# EAGLE board Gibbot v4 (EAGLE 5.12), part 1 of 2
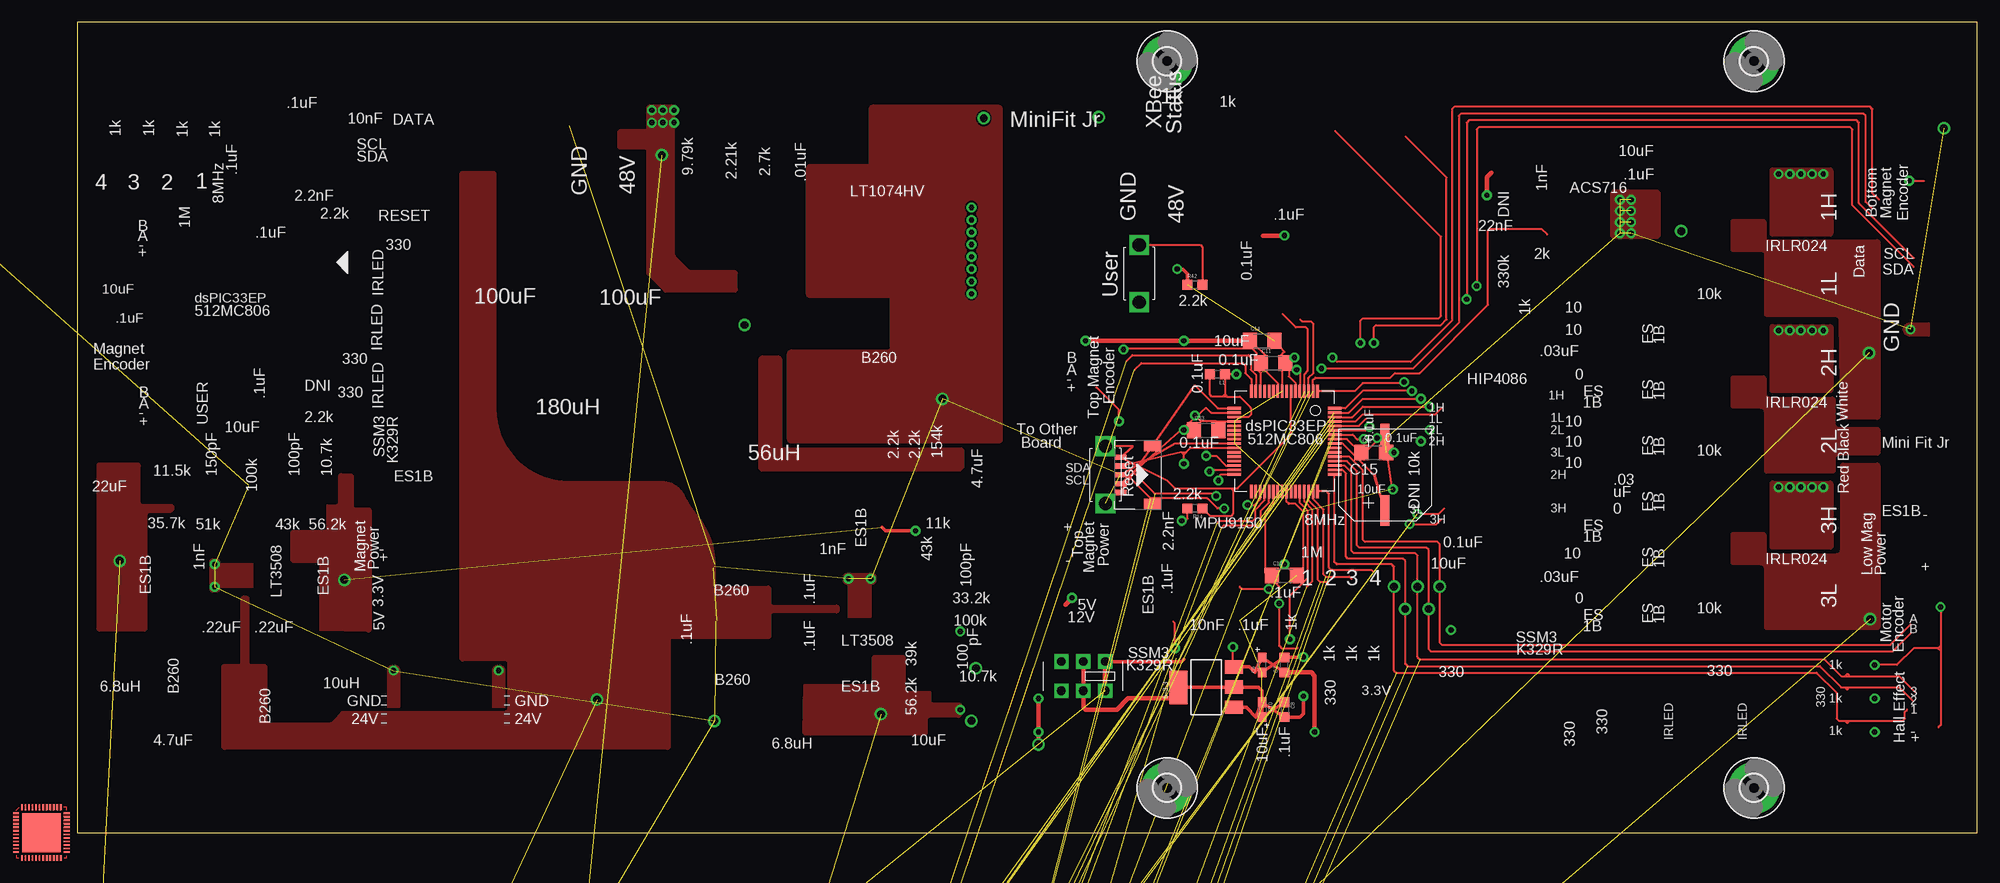
[diagram p0: board, top side]
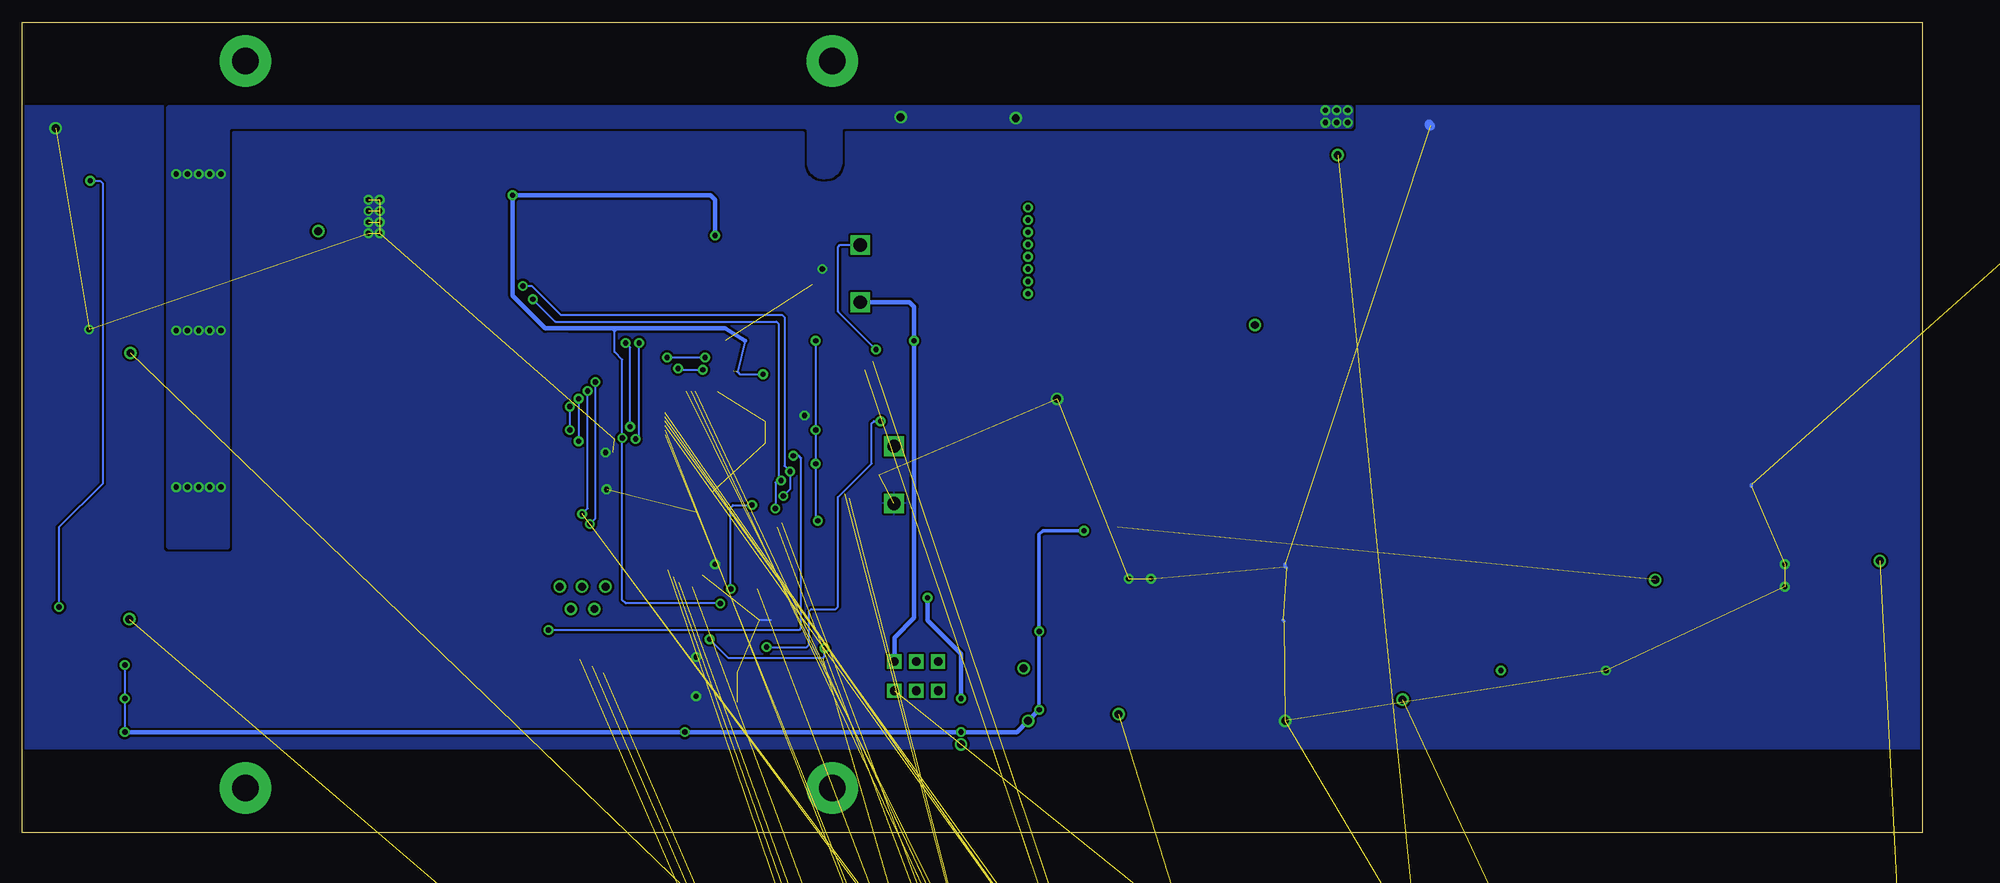
[diagram p1: board, bottom side, seen from below]

Size 215.9 x 92.08 mm. Coordinates in mm from the lower left corner, seen from the top.
Outline: 0,0 215.9,0 215.9,92.08 0,92.08 0,0
Copper layers (1*16): Top 0.035mm / dielectric 1.5mm / Bottom 0.035mm
Design rules "SparkFun *": minimum track width 8mil, minimum drill 20mil, track to track 8mil, track to pad 8mil, pad to pad 0mil, via to via 8mil, smd to smd 0mil, copper to edge 10mil, drill to drill 8mil, minimum pad ring 12mil, minimum via ring 10mil, stop-mask expansion 4mil, vias tented up to drill 25mil, thermal gap 10mil

## Footprints (pad centres in the part's own frame; a part is rotated, then mirrored left to right if it is on the bottom)
SOT223 = smd 1.499 x 2.007: 1 -2.261,-3.15; 2 0.025,-3.15; 3 2.311,-3.15 | smd 3.81 x 2.007: 4 0,3.15
R0603 = smd 1 x 1.1: 1 -0.85,0; 2 0.85,0
1X02_LOCK = drill 1.016 pad 1.88 round: 1 -0.178,0; 2 2.718,0
SOT23F = smd 0.6 x 0.65: D 0,1.125; G -0.95,-1.125; S 0.95,-1.125
0603 = smd 1.1 x 1.1: 1 -0.85,0; 2 0.85,0
0603-POL = smd 1.1 x 1: + 0.85,0; - -0.85,0
1206 = smd 1.6 x 1.8: 1 -1.4,0; 2 1.4,0
EEH-ZA1H101P = smd 1 x 3.5: + 0,-4.05; - 0,4.05
0603-CAP = smd 1.1 x 1: 1 -0.85,0; 2 0.85,0
CAP-PTH-SMALL = drill 0.7 pad 1.651 round: 1 0,0; 2 2.54,0
PCV10 = smd 1.5 x 3.9: + 0,-4.25; - 0,4.25
SMA-DIODE@1 = smd 1.27 x 1.47: A -2.15,0; C 2.15,0
SMB-DIODE = smd 1.75 x 2.3: A -2.54,0; C 2.54,0
POWERDI5 = smd 3.36 x 1.4: A 0,-4.057 | smd 3.36 x 5.01: C 0,0
JST-SH-2 = smd 0.6 x 1.35: 1 0.5,4.675; 2 -0.5,4.675 | smd 1.2 x 2: P$6 -1.8,1; P$7 1.8,1
3,0-PAD = drill 3 pad 5.842 round: B3,0 0,0
JST-SH-5 = smd 0.6 x 1.35: 1 2,4.675; 2 1,4.675; 3 0,4.675; 4 -1,4.675; 5 -2,4.675 | smd 1.2 x 2: P$6 -3.3,1; P$7 3.3,1
JST-SH-4 = smd 0.65 x 1.36: 1 -1.5,4.68; 2 -0.5,4.68; 3 0.5,4.68; 4 1.5,4.68 | smd 1.3 x 2.1: P$5 2.85,1.05; P$6 -2.85,1.05
1X05_LONGPADS = drill 1.118 pad 1.88 long: 1 0,0; 2 2.54,0; 3 5.08,0; 4 7.62,0; 5 10.16,0
1X01 = drill 1.016 pad 1.88 round: 1 0,0
WM8601 = drill 1.854 round: 1 0,1.1; 2 0,6.6 | drill 3.2 round: P$1 0,-6.274
1X01NS = drill 1.016 pad 1.88 round: 1 0,0
SRN6045 = smd 2 x 6: P$1 -2.15,0; P$2 2.15,0
2200LL-820 = drill 1.27 square: 1 0,13.081; 2 0,-13.081
2100LL-181 = drill 1.1 square: 1 0,9.652; 2 0,-9.652
0603-DIODE = smd 1.1 x 1.1: AN -0.85,0; CAT 0.85,0
D2PAK@1 = smd 11.43 x 8.89: D 0,4.445 | smd 2.083 x 3.81: G -2.54,-6.985; S 2.54,-6.985
DPAK = smd 5.791 x 6.274: D 0,1.587 | smd 1.6 x 3: G -2.286,-4.851; S 2.286,-4.851
TACTILE_SWITCH = drill 1.5 square: 1 -3.25,0; 2 3.25,0
39-30-3036 = drill 1.803 round: 1 4.191,0; 2 0,0; 3 -4.191,0 | hole 3: -4.204,-7.29; 4.204,-7.29
D2PAK = smd 11.43 x 9.65: D 0,4.445 | smd 2.083 x 3.81: G -2.54,-6.985; S 2.54,-6.985
1X05 = drill 1.016 pad 1.88 round: 1 0,0; 2 2.54,0; 3 5.08,0; 4 7.62,0; 5 10.16,0
PWR4412-B = drill 1.27 round: P$1 -6.225,0; P$2 6.225,0
TQFP64_10X10 = smd 1.5 x 0.3: 1 -5.7,3.75; 2 -5.7,3.25; 3 -5.7,2.75; 4 -5.7,2.25; 5 -5.7,1.75; 6 -5.7,1.25; 7 -5.7,0.75; 8 -5.7,0.25; 9 -5.7,-0.25; 10 -5.7,-0.75; 11 -5.7,-1.25; 12 -5.7,-1.75; 13 -5.7,-2.25; 14 -5.7,-2.75; 15 -5.7,-3.25; 16 -5.7,-3.75; 33 5.7,-3.75; 34 5.7,-3.25; 35 5.7,-2.75; 36 5.7,-2.25; 37 5.7,-1.75; 38 5.7,-1.25; 39 5.7,-0.75; 40 5.7,-0.25; 41 5.7,0.25; 42 5.7,0.75; 43 5.7,1.25; 44 5.7,1.75; 45 5.7,2.25; 46 5.7,2.75; 47 5.7,3.25; 48 5.7,3.75 | smd 0.3 x 1.5: 17 -3.75,-5.7; 18 -3.25,-5.7; 19 -2.75,-5.7; 20 -2.25,-5.7; 21 -1.75,-5.7; 22 -1.25,-5.7; 23 -0.75,-5.7; 24 -0.25,-5.7; 25 0.25,-5.7; 26 0.75,-5.7; 27 1.25,-5.7; 28 1.75,-5.7; 29 2.25,-5.7; 30 2.75,-5.7; 31 3.25,-5.7; 32 3.75,-5.7; 49 3.75,5.7; 50 3.25,5.7; 51 2.75,5.7; 52 2.25,5.7; 53 1.75,5.7; 54 1.25,5.7; 55 0.75,5.7; 56 0.25,5.7; 57 -0.25,5.7; 58 -0.75,5.7; 59 -1.25,5.7; 60 -1.75,5.7; 61 -2.25,5.7; 62 -2.75,5.7; 63 -3.25,5.7; 64 -3.75,5.7
TQFPNL-48 = smd 0.65 x 0.2: 1 -2.875,2.2; 2 -2.875,1.8; 3 -2.875,1.4; 4 -2.875,1; 5 -2.875,0.6; 6 -2.875,0.2; 7 -2.875,-0.2; 8 -2.875,-0.6; 9 -2.875,-1; 10 -2.875,-1.4; 11 -2.875,-1.8; 12 -2.875,-2.2; 25 2.875,-2.2; 26 2.875,-1.8; 27 2.875,-1.4; 28 2.875,-1; 29 2.875,-0.6; 30 2.875,-0.2; 31 2.875,0.2; 32 2.875,0.6; 33 2.875,1; 34 2.875,1.4; 35 2.875,1.8; 36 2.875,2.2 | smd 0.2 x 0.65: 13 -2.2,-2.875; 14 -1.8,-2.875; 15 -1.4,-2.875; 16 -1,-2.875; 17 -0.6,-2.875; 18 -0.2,-2.875; 19 0.2,-2.875; 20 0.6,-2.875; 21 1,-2.875; 22 1.4,-2.875; 23 1.8,-2.875; 24 2.2,-2.875; 37 2.2,2.875; 38 1.8,2.875; 39 1.4,2.875; 40 1,2.875; 41 0.6,2.875; 42 0.2,2.875; 43 -0.2,2.875; 44 -0.6,2.875; 45 -1,2.875; 46 -1.4,2.875; 47 -1.8,2.875; 48 -2.2,2.875 | smd 4.4 x 4.4: PAD 0,0
SSOP28-NARROW = smd 0.432 x 1.27: P$1 -4.128,-2.54; P$2 -3.493,-2.54; P$3 -2.857,-2.54; P$4 -2.223,-2.54; P$5 -1.587,-2.54; P$6 -0.953,-2.54; P$7 -0.318,-2.54; P$8 0.318,-2.54; P$9 0.953,-2.54; P$10 1.587,-2.54; P$11 2.223,-2.54; P$12 2.857,-2.54; P$13 3.493,-2.54; P$14 4.128,-2.54; P$15 4.128,2.54; P$16 3.493,2.54; P$17 2.857,2.54; P$18 2.223,2.54; P$19 1.587,2.54; P$20 0.953,2.54; P$21 0.318,2.54; P$22 -0.318,2.54; P$23 -0.953,2.54; P$24 -1.587,2.54; P$25 -2.223,2.54; P$26 -2.857,2.54; P$27 -3.493,2.54; P$28 -4.128,2.54
DIODE-ZENER = drill 0.9 round: P$1 -3.556,0; P$2 3.556,0
TO220-5 = drill 1.1 square: 1 3.81,-3.404; 2 0,-1.702; 3 3.81,0; 4 0,1.702; 5 3.81,3.404 | smd 12.7 x 10.541: PAD -16.434,0 | drill 3.937 round: PAD2 -18.72,0
XBEE-SILK = drill 0.8 pad 1.524 round: 1 -11,20; 2 -11,18; 3 -11,16; 4 -11,14; 5 -11,12; 6 -11,10; 7 -11,8; 8 -11,6; 9 -11,4; 10 -11,2; 11 11,2; 12 11,4; 13 11,6; 14 11,8; 15 11,10; 16 11,12; 17 11,14; 18 11,16; 19 11,18; 20 11,20
LGA24_4X4 = smd 0.8 x 0.35: 1 -2,1.25; 2 -2,0.75; 3 -2,0.25; 4 -2,-0.25; 5 -2,-0.75; 6 -2,-1.25; 13 2,-1.25; 14 2,-0.75; 15 2,-0.25; 16 2,0.25; 17 2,0.75; 18 2,1.25 | smd 0.35 x 0.85: 7 -1.25,-1.975; 8 -0.75,-1.975; 9 -0.25,-1.975; 10 0.25,-1.975; 11 0.75,-1.975; 12 1.25,-1.975; 19 1.25,1.975; 20 0.75,1.975; 21 0.25,1.975; 22 -0.25,1.975; 23 -0.75,1.975; 24 -1.25,1.975
TSSOP16 = smd 0.45 x 1.05: 1 -2.275,-2.775; 2 -1.625,-2.775; 3 -0.975,-2.775; 4 -0.325,-2.775; 5 0.325,-2.775; 6 0.975,-2.775; 7 1.625,-2.775; 8 2.275,-2.775; 9 2.275,2.775; 10 1.625,2.775; 11 0.975,2.775; 12 0.325,2.775; 13 -0.325,2.775; 14 -0.975,2.775; 15 -1.625,2.775; 16 -2.275,2.775 | smd 2.8 x 2.8: 17 0,0
SOIC24-W = smd 0.533 x 1.981: 1 -6.985,-4.686; 2 -5.715,-4.686; 3 -4.445,-4.686; 4 -3.175,-4.686; 5 -1.905,-4.686; 6 -0.635,-4.686; 7 0.635,-4.686; 8 1.905,-4.686; 9 3.175,-4.686; 10 4.445,-4.686; 11 5.715,-4.686; 12 6.985,-4.686; 13 6.985,4.686; 14 5.715,4.686; 15 4.445,4.686; 16 3.175,4.686; 17 1.905,4.686; 18 0.635,4.686; 19 -0.635,4.686; 20 -1.905,4.686; 21 -3.175,4.686; 22 -4.445,4.686; 23 -5.715,4.686; 24 -6.985,4.686
SOIC16-W = smd 0.65 x 2.25: 1 -4.445,-4.75; 2 -3.175,-4.75; 3 -1.905,-4.75; 4 -0.635,-4.75; 5 0.635,-4.75; 6 1.905,-4.75; 7 3.175,-4.75; 8 4.445,-4.75; 9 4.445,4.75; 10 3.175,4.75; 11 1.905,4.75; 12 0.635,4.75; 13 -0.635,4.75; 14 -1.905,4.75; 15 -3.175,4.75; 16 -4.445,4.75
SLIDE_SWITCH = drill 1 square: 1 -2.489,1.651; 2 0,1.651; 3 2.489,1.651; 4 2.489,-1.651; 5 0,-1.651; 6 -2.489,-1.651

## Placement (x,y rotation side)
5-3.3  REG1117  [SOT223]  128.27,16.51 90 top
21.5K1  21.5k  [R0603]  10.16,-120.65 0 top  (outside the outline)
BAT  [1X02_LOCK]  -40.64,184.15 0 top  (outside the outline)
BMAGMOS_2  N-MOSSOT23F  [SOT23F]  39.37,-349.25 0 top  (outside the outline)
C1  .1uF  [0603]  33.02,-224.79 0 top  (outside the outline)
C2  1nF  [0603]  36.83,-224.79 0 top  (outside the outline)
C3  DNI  [0603]  1.27,-231.14 0 top  (outside the outline)
C4  22nF  [0603]  5.08,-231.14 0 top  (outside the outline)
C5  10uF  [0603]  26.67,-224.79 0 top  (outside the outline)
C6  .1uF  [0603]  43.18,-295.91 0 top  (outside the outline)
C7  0.1uF  [0603]  137.16,19.05 90 top
C8  0.1uF  [0603]  137.16,13.97 270 top
C9  10uF  [0603-POL]  134.62,19.05 90 top
C10  10uF  [0603-POL]  134.62,13.97 270 top
C11  .1uF  [1206]  135.89,53.34 0 top
C12  .1uF  [1206]  147.32,43.18 0 top
C13  .1uF  [1206]  137.16,29.21 0 top
C14  10uF  [1206]  134.62,55.88 0 top
C15  10uF  [EEH-ZA1H101P]  148.59,40.64 0 top
C16  DNI  [0603]  7.62,-177.8 0 top  (outside the outline)
C17  .03uF  [0603]  11.43,-177.8 0 top  (outside the outline)
C18  .03uF  [0603]  15.24,-177.8 0 top  (outside the outline)
C19  .03uF  [0603]  19.05,-177.8 0 top  (outside the outline)
C20  10nF  [0603]  46.99,-295.91 0 top  (outside the outline)
C21  .1uF  [0603]  1.27,-302.26 0 top  (outside the outline)
C22  .1uF  [0603]  5.08,-302.26 0 top  (outside the outline)
C23  2.2nF  [0603]  8.89,-302.26 0 top  (outside the outline)
C24  10nF  [0603]  35.56,-341.63 0 top  (outside the outline)
C25  .1uF  [0603]  39.37,-341.63 0 top  (outside the outline)
C26  .1uF  [0603]  1.27,-349.25 0 top  (outside the outline)
C27  2.2nF  [0603]  5.08,-349.25 0 top  (outside the outline)
C28  1nF  [0603]  8.89,-349.25 0 top  (outside the outline)
C29  .1uF  [0603]  22.86,-177.8 0 top  (outside the outline)
C30  10uF  [0603]  25.4,-161.29 0 top  (outside the outline)
C31  150pF  [0603]  12.7,-349.25 0 top  (outside the outline)
C32  22uF  [0603]  16.51,-349.25 0 top  (outside the outline)
C33  .1uF  [1206]  128.27,45.72 0 top
C34  100pf  [0603]  20.32,-349.25 0 top  (outside the outline)
C35  10uF  [0603]  24.13,-349.25 0 top  (outside the outline)
C36  0.22uF  [0603]  27.94,-349.25 0 top  (outside the outline)
C37  0.22uF  [0603]  31.75,-349.25 0 top  (outside the outline)
C38  4.7uF  [0603-CAP]  35.56,-349.25 0 top  (outside the outline)
C39  [0603]  -6.35,-375.92 0 top  (outside the outline)
C40  100uF  [EEH-ZA1H101P]  -20.32,-375.92 0 top  (outside the outline)
C41  100uF  [EEH-ZA1H101P]  -31.75,-375.92 0 top  (outside the outline)
C42  [0603]  -35.56,-384.81 0 top  (outside the outline)
C43  220n  [0603]  -39.37,-400.05 0 top  (outside the outline)
C44  [0603]  -38.1,-421.64 0 top  (outside the outline)
C45  [0603]  -74.93,-445.77 0 top  (outside the outline)
C46  [0603-CAP]  -74.93,-453.39 0 top  (outside the outline)
C47  [0603]  -62.23,107.95 0 top  (outside the outline)
C48  [0603]  -58.42,107.95 0 top  (outside the outline)
C49  [0603]  -81.28,-464.82 0 top  (outside the outline)
C50  [0603]  -81.28,-480.06 0 top  (outside the outline)
C51  [0603]  -81.28,-487.68 0 top  (outside the outline)
C52  [0603]  -81.28,-491.49 0 top  (outside the outline)
C53  [0603]  -81.28,-502.92 0 top  (outside the outline)
C55  .1uF  [0603]  22.86,-58.42 0 top  (outside the outline)
C56  .1uF  [0603]  26.67,-58.42 0 top  (outside the outline)
C57  .1uF  [0603]  30.48,-58.42 0 top  (outside the outline)
C58  10uF  [0603]  2.54,-39.37 0 top  (outside the outline)
C63  10uF  [0603-POL]  16.51,-53.34 0 top  (outside the outline)
C72  1nF  [0603]  53.34,-128.27 0 top  (outside the outline)
C73  100pF  [0603]  57.15,-128.27 0 top  (outside the outline)
C74  4.7uF  [0603]  1.27,-134.62 0 top  (outside the outline)
C75  100pf  [0603]  5.08,-134.62 0 top  (outside the outline)
C76  10uF  [0603]  8.89,-134.62 0 top  (outside the outline)
C77  0.1uF  [0603]  12.7,-134.62 0 top  (outside the outline)
C78  0.1uF  [0603]  16.51,-134.62 0 top  (outside the outline)
C79  0.1uF  [0603-CAP]  20.32,-134.62 0 top  (outside the outline)
CBIAS  1uF  [CAP-PTH-SMALL]  -50.8,196.85 0 top  (outside the outline)
CI1  100uF  [PCV10]  -39.37,153.67 0 top  (outside the outline)
CI2  100uF  [PCV10]  -26.67,153.67 0 top  (outside the outline)
CIBMON  10nF  [CAP-PTH-SMALL]  -44.45,196.85 0 top  (outside the outline)
CIIMON  10nF  [CAP-PTH-SMALL]  -38.1,196.85 0 top  (outside the outline)
CO1  100uF  [PCV10]  -76.2,175.26 0 top  (outside the outline)
CO2  100uF  [PCV10]  -63.5,175.26 0 top  (outside the outline)
CTMR  0  [CAP-PTH-SMALL]  -31.75,196.85 0 top  (outside the outline)
CVIN  1uF  [CAP-PTH-SMALL]  -25.4,196.85 0 top  (outside the outline)
CVIN1  1uF  [CAP-PTH-SMALL]  -81.28,201.93 0 top  (outside the outline)
D1  ES1B  [SMA-DIODE@1]  2.54,-168.91 0 top  (outside the outline)
D2  ES1B  [SMA-DIODE@1]  10.16,-168.91 0 top  (outside the outline)
D3  ES1B  [SMA-DIODE@1]  17.78,-168.91 0 top  (outside the outline)
D4  ES1B  [SMA-DIODE@1]  25.4,-168.91 0 top  (outside the outline)
D5  ES1B  [SMA-DIODE@1]  2.54,-173.99 0 top  (outside the outline)
D6  ES1B  [SMA-DIODE@1]  38.1,-297.18 0 top  (outside the outline)
D7  ES1B  [SMA-DIODE@1]  15.24,-342.9 0 top  (outside the outline)
D8  B260  [SMB-DIODE]  3.81,-328.93 0 top  (outside the outline)
D9  ES1B  [SMA-DIODE@1]  10.16,-173.99 0 top  (outside the outline)
D10  ES1B  [SMA-DIODE@1]  17.78,-173.99 0 top  (outside the outline)
D11  ES1B  [SMA-DIODE@1]  22.86,-342.9 0 top  (outside the outline)
D12  B260  [SMB-DIODE]  12.7,-328.93 0 top  (outside the outline)
D13  ES1B  [SMA-DIODE@1]  30.48,-342.9 0 top  (outside the outline)
D14  PDS760  [POWERDI5]  -29.21,173.99 0 top  (outside the outline)
D19  ES1B  [SMA-DIODE@1]  25.4,-173.99 0 top  (outside the outline)
D20  ES1B  [SMA-DIODE@1]  2.54,-179.07 0 top  (outside the outline)
D26  B260  [SMB-DIODE]  41.91,-111.76 0 top  (outside the outline)
D27  ES1B  [SMA-DIODE@1]  40.64,-129.54 0 top  (outside the outline)
D28  B260  [SMB-DIODE]  50.8,-111.76 0 top  (outside the outline)
D29  ES1B  [SMA-DIODE@1]  48.26,-129.54 0 top  (outside the outline)
D30  B260  [SMB-DIODE]  3.81,-121.92 0 top  (outside the outline)
DATA1_1  [JST-SH-2]  2.54,-359.41 0 top  (outside the outline)
DATA3  [JST-SH-2]  35.56,-271.78 0 top  (outside the outline)
DATA4  [JST-SH-2]  43.18,-271.78 0 top  (outside the outline)
GND59  [JST-SH-2]  2.54,-281.94 0 top  (outside the outline)
H1  MOUNT-PAD-ROUND3.0  [3,0-PAD]  123.83,5.08 0 top
H2  MOUNT-PAD-ROUND3.0  [3,0-PAD]  190.5,5.08 0 top
H3  MOUNT-PAD-ROUND3.0  [3,0-PAD]  190.5,87.63 0 top
H4  MOUNT-PAD-ROUND3.0  [3,0-PAD]  123.83,87.63 0 top
H5  MOUNT-PAD-ROUND3.0  [3,0-PAD]  13.97,-308.61 0 top  (outside the outline)
H6  MOUNT-PAD-ROUND3.0  [3,0-PAD]  22.86,-308.61 0 top  (outside the outline)
H11  MOUNT-PAD-ROUND3.0  [3,0-PAD]  3.81,-111.76 0 top  (outside the outline)
H12  MOUNT-PAD-ROUND3.0  [3,0-PAD]  12.7,-111.76 0 top  (outside the outline)
HALL1  [JST-SH-5]  39.37,-241.3 0 top  (outside the outline)
IRLED7  [JST-SH-2]  10.16,-281.94 0 top  (outside the outline)
IRLED8  [JST-SH-2]  17.78,-281.94 0 top  (outside the outline)
IRLED9  [JST-SH-2]  25.4,-281.94 0 top  (outside the outline)
IRLED10  [JST-SH-2]  36.83,-25.4 0 top  (outside the outline)
IRLED11  [JST-SH-2]  44.45,-25.4 0 top  (outside the outline)
IRLED12  [JST-SH-2]  52.07,-25.4 0 top  (outside the outline)
JP1  [JST-SH-4]  31.75,-312.42 0 top  (outside the outline)
JP2  [1X05_LONGPADS]  -5.08,-372.11 0 top  (outside the outline)
JP3  M01PTH  [1X01]  -39.37,172.72 0 top  (outside the outline)
JP4  [JST-SH-4]  3.81,-322.58 0 top  (outside the outline)
JP5  [WM8601]  -78.74,160.02 0 top  (outside the outline)
JP14  M01SMDNS  [1X01NS]  -49.53,201.93 0 top  (outside the outline)
L1  DNI  [0603]  129.54,52.07 180 top
L2  6.8uH  [SRN6045]  27.94,-327.66 0 top  (outside the outline)
L3  10uH  [SRN6045]  35.56,-327.66 0 top  (outside the outline)
L4  82uH  [2200LL-820]  -67.31,132.08 0 top  (outside the outline)
L8  DNI  [0603]  24.13,-63.5 0 top  (outside the outline)
L11  6.8uH  [SRN6045]  20.32,-120.65 0 top  (outside the outline)
L12  56uH  [2100LL-181]  11.43,-77.47 0 top  (outside the outline)
L13  15uH  [2100LL-181]  35.56,-77.47 0 top  (outside the outline)
LED1  [0603-DIODE]  -45.72,201.93 0 top  (outside the outline)
LED2  [0603-DIODE]  -41.91,201.93 0 top  (outside the outline)
LED6  [0603-DIODE]  12.7,-302.26 0 top  (outside the outline)
LED7  [0603-DIODE]  16.51,-302.26 0 top  (outside the outline)
LED8  [0603-DIODE]  20.32,-302.26 0 top  (outside the outline)
LED9  [0603-DIODE]  24.13,-302.26 0 top  (outside the outline)
LED10  [0603-DIODE]  31.75,-63.5 0 top  (outside the outline)
LED11  [0603-DIODE]  35.56,-63.5 0 top  (outside the outline)
LED12  [0603-DIODE]  39.37,-63.5 0 top  (outside the outline)
LED13  [0603-DIODE]  43.18,-63.5 0 top  (outside the outline)
LED14  [0603-DIODE]  27.94,-302.26 0 top  (outside the outline)
LOWMAG1  [JST-SH-2]  11.43,-322.58 0 top  (outside the outline)
M1  [SOT23F]  -43.18,-407.67 0 top  (outside the outline)
M2  [SOT23F]  -34.29,-421.64 0 top  (outside the outline)
M3  IRF1404  [D2PAK@1]  -49.53,-420.37 0 top  (outside the outline)
M4  FDD8451  [DPAK]  -58.42,-427.99 0 top  (outside the outline)
M5  [D2PAK@1]  -69.85,-426.72 0 top  (outside the outline)
M6  [SOT23F]  -74.93,115.57 0 top  (outside the outline)
M7  [SOT23F]  -71.12,115.57 0 top  (outside the outline)
MAINRESET  TACTILE_SWITCH  [TACTILE_SWITCH]  116.84,40.64 270 top
MAINUSER  TACTILE_SWITCH  [TACTILE_SWITCH]  120.65,63.5 90 top
MOT1  [39-30-3036]  7.62,-182.88 0 top  (outside the outline)
P1  P-MOS  [D2PAK]  -45.72,128.27 0 top  (outside the outline)
P2  P-MOS  [D2PAK]  -31.75,128.27 0 top  (outside the outline)
POWER1  [JST-SH-4]  21.59,-114.3 0 top  (outside the outline)
POWER1_2  [JST-SH-4]  3.81,-312.42 0 top  (outside the outline)
POWER2_2  [JST-SH-2]  20.32,-322.58 0 top  (outside the outline)
POWER3  [JST-SH-2]  20.32,-271.78 0 top  (outside the outline)
POWER5  [JST-SH-2]  52.07,-76.2 0 top  (outside the outline)
PROG  [JST-SH-5]  123.19,40.64 90 top
PROG_1  [1X05]  2.54,-54.61 0 top  (outside the outline)
R1  2k  [0603]  16.51,-226.06 0 top  (outside the outline)
R2  1k  [0603]  21.59,-226.06 0 top  (outside the outline)
R3  330k  [0603]  33.02,-213.36 0 top  (outside the outline)
R4  20k  [0603]  1.27,-226.06 0 top  (outside the outline)
R5  20k  [0603]  6.35,-226.06 0 top  (outside the outline)
R6  20k  [0603]  11.43,-226.06 0 top  (outside the outline)
R7  1k  [0603]  21.59,-297.18 0 top  (outside the outline)
R8  1k  [0603]  26.67,-297.18 0 top  (outside the outline)
R9  1k  [0603]  31.75,-297.18 0 top  (outside the outline)
R10  1k  [0603]  15.24,-287.02 0 top  (outside the outline)
R11  52.3k  [0603]  2.54,-336.55 0 top  (outside the outline)
R12  51k  [0603]  2.54,-344.17 0 top  (outside the outline)
R13  11.5k  [0603]  8.89,-336.55 0 top  (outside the outline)
R14  2.2k  [0603]  127,36.83 180 top
R15  35.7k  [0603]  15.24,-336.55 0 top  (outside the outline)
R16  10k  [0603]  20.32,-162.56 0 top  (outside the outline)
R17  1k  [0603]  20.32,-287.02 0 top  (outside the outline)
R18  1k  [0603]  25.4,-287.02 0 top  (outside the outline)
R19  1k  [0603]  30.48,-287.02 0 top  (outside the outline)
R20  56.2k  [0603]  21.59,-336.55 0 top  (outside the outline)
R21  10.7k  [0603]  27.94,-336.55 0 top  (outside the outline)
R22  43k  [0603]  7.62,-344.17 0 top  (outside the outline)
R23  100k  [0603]  34.29,-336.55 0 top  (outside the outline)
R24  1k  [R0603]  -12.7,-374.65 0 top  (outside the outline)
R25  10k  [R0603]  -12.7,-381 0 top  (outside the outline)
R26  [0603]  -43.18,-411.48 0 top  (outside the outline)
R27  30k  [0603]  -39.37,-403.86 0 top  (outside the outline)
R28  330k  [0603]  -39.37,-407.67 0 top  (outside the outline)
R29  1k  [R0603]  -41.91,-416.56 0 top  (outside the outline)
R30  10k  [R0603]  -36.83,-416.56 0 top  (outside the outline)
R31  1k  [0603]  35.56,-287.02 0 top  (outside the outline)
R32  330  [0603]  40.64,-287.02 0 top  (outside the outline)
R33  330  [0603]  45.72,-287.02 0 top  (outside the outline)
R34  10ohm  [0603]  17.78,-140.97 0 top  (outside the outline)
R35  10ohm  [0603]  25.4,-140.97 0 top  (outside the outline)
R36  10ohm  [0603]  1.27,-154.94 0 top  (outside the outline)
R37  10ohm  [0603]  8.89,-154.94 0 top  (outside the outline)
R38  10ohm  [0603]  16.51,-154.94 0 top  (outside the outline)
R39  10ohm  [0603]  24.13,-154.94 0 top  (outside the outline)
R40  0ohm  [0603]  1.27,-162.56 0 top  (outside the outline)
R41  0ohm  [0603]  7.62,-162.56 0 top  (outside the outline)
R42  2.2k  [0603]  127,62.23 0 top
R43  0ohm  [0603]  13.97,-162.56 0 top  (outside the outline)
R44  330  [0603]  1.27,-297.18 0 top  (outside the outline)
R45  330k  [0603]  -41.91,-421.64 0 top  (outside the outline)
R46  [0603]  -41.91,-426.72 0 top  (outside the outline)
R47  [0603]  -52.07,-430.53 0 top  (outside the outline)
R48  [0603]  -52.07,-434.34 0 top  (outside the outline)
R49  [0603]  -74.93,-438.15 0 top  (outside the outline)
R50  [0603]  -74.93,-441.96 0 top  (outside the outline)
R51  [0603]  -74.93,-449.58 0 top  (outside the outline)
R52  1k  [R0603]  -74.93,102.87 0 top  (outside the outline)
R53  10k  [R0603]  -69.85,102.87 0 top  (outside the outline)
R54  [0603]  -74.93,-457.2 0 top  (outside the outline)
R55  [0603]  -67.31,115.57 0 top  (outside the outline)
R56  1k  [R0603]  -64.77,102.87 0 top  (outside the outline)
R57  10k  [R0603]  -74.93,110.49 0 top  (outside the outline)
R58  [0603]  -81.28,-483.87 0 top  (outside the outline)
R59  330k  [0603]  -74.93,-461.01 0 top  (outside the outline)
R60  10k  [R0603]  -81.28,-459.74 0 top  (outside the outline)
R61  2.2k  [0603]  46.99,-39.37 0 top  (outside the outline)
R62  [0603]  -81.28,-468.63 0 top  (outside the outline)
R63  [0603]  -81.28,-476.25 0 top  (outside the outline)
R64  [0603]  -81.28,-495.3 0 top  (outside the outline)
R65  [0603]  -81.28,-499.11 0 top  (outside the outline)
R66  1k  [0603]  1.27,-46.99 0 top  (outside the outline)
R67  1k  [0603]  6.35,-46.99 0 top  (outside the outline)
R68  1k  [0603]  11.43,-46.99 0 top  (outside the outline)
R69  1k  [0603]  16.51,-46.99 0 top  (outside the outline)
R70  330  [0603]  21.59,-46.99 0 top  (outside the outline)
R71  330  [0603]  26.67,-46.99 0 top  (outside the outline)
R72  330  [0603]  31.75,-46.99 0 top  (outside the outline)
R73  2.2k  [0603]  36.83,-46.99 0 top  (outside the outline)
R74  1k  [0603]  -57.15,201.93 0 top  (outside the outline)
R75  1k  [0603]  -53.34,201.93 0 top  (outside the outline)
R76  21.6k  [1206]  -33.02,185.42 0 top  (outside the outline)
R77  [0603]  -81.28,-506.73 0 top  (outside the outline)
R78  [0603]  -81.28,-510.54 0 top  (outside the outline)
R82  33.2k  [0603]  25.4,-120.65 0 top  (outside the outline)
R83  43k  [0603]  7.62,-129.54 0 top  (outside the outline)
R84  11k  [0603]  12.7,-129.54 0 top  (outside the outline)
R85  154k  [0603]  31.75,-120.65 0 top  (outside the outline)
R86  56.2k  [0603]  38.1,-120.65 0 top  (outside the outline)
R87  10.7k  [0603]  44.45,-120.65 0 top  (outside the outline)
R88  39k  [0603]  17.78,-129.54 0 top  (outside the outline)
R89  2.2k  [0603]  22.86,-129.54 0 top  (outside the outline)
R90  2.2k  [0603]  27.94,-129.54 0 top  (outside the outline)
R91  100k  [0603]  50.8,-120.65 0 top  (outside the outline)
R92  2.21k  [0603]  1.27,-129.54 0 top  (outside the outline)
R93  2.7k  [0603]  33.02,-129.54 0 top  (outside the outline)
RBFB1  BFB1  [1206]  -25.4,185.42 0 top  (outside the outline)
RBFB2  133k  [1206]  -78.74,191.77 0 top  (outside the outline)
RCL  8k  [1206]  -71.12,191.77 0 top  (outside the outline)
RCS  5mOhm  [PWR4412-B]  -74.93,185.42 0 top  (outside the outline)
RCX  4k  [1206]  -63.5,191.77 0 top  (outside the outline)
RD  9.91k  [1206]  -55.88,191.77 0 top  (outside the outline)
RFB1  FB1  [1206]  -48.26,191.77 0 top  (outside the outline)
RFB2  2.21k  [1206]  -40.64,191.77 0 top  (outside the outline)
RFDBK  10k  [1206]  -33.02,191.77 0 top  (outside the outline)
RIL  10k  [1206]  -25.4,191.77 0 top  (outside the outline)
RIS  5mOhm  [PWR4412-B]  -59.69,185.42 0 top  (outside the outline)
RMV1  VM1  [1206]  -78.74,196.85 0 top  (outside the outline)
RNTC1  NTC  [CAP-PTH-SMALL]  -74.93,201.93 0 top  (outside the outline)
ROFB1  OFB1  [1206]  -71.12,196.85 0 top  (outside the outline)
ROFB2  127k  [1206]  -63.5,196.85 0 top  (outside the outline)
RVM2  100k  [1206]  -55.88,196.85 0 top  (outside the outline)
SECRESET1  TACTILE_SWITCH  [TACTILE_SWITCH]  26.67,-53.34 0 top  (outside the outline)
SECUSER1  TACTILE_SWITCH  [TACTILE_SWITCH]  36.83,-53.34 0 top  (outside the outline)
TMAG1  [JST-SH-4]  12.7,-271.78 0 top  (outside the outline)
TMAGMOS1  N-MOSSOT23F  [SOT23F]  31.75,-302.26 0 top  (outside the outline)
TO_PIC  [1X02_LOCK]  -49.53,184.15 0 top  (outside the outline)
TOPMAG1  [JST-SH-2]  27.94,-271.78 0 top  (outside the outline)
U$1  DSPIC33EP512MC806  [TQFP64_10X10]  137.16,44.45 270 top
U$2  IRLR024  [DPAK]  5.08,-201.93 0 top  (outside the outline)
U$3  ISL94203  [TQFPNL-48]  -4.07,0 0 top
U$4  DSPIC33EP512MC806  [TQFP64_10X10]  2.54,-24.13 0 top  (outside the outline)
U$5  [TQFPNL-48]  -3.81,-364.49 0 top  (outside the outline)
U$6  LTC4000  [SSOP28-NARROW]  -49.53,172.72 0 top  (outside the outline)
U$7  DIODE-ZENERPTH  [DIODE-ZENER]  -64.77,201.93 0 top  (outside the outline)
U$8  LT1074HV  [TO220-5]  -50.8,154.94 0 top  (outside the outline)
U$13  XBEE-1B2  [XBEE-SILK]  12.7,-261.62 0 top  (outside the outline)
U$16  MPU-9150  [LGA24_4X4]  20.32,-328.93 0 top  (outside the outline)
U$17  MPU-9150  [LGA24_4X4]  10.16,-288.29 0 top  (outside the outline)
U$21  LT3508  [TSSOP16]  30.48,-318.77 0 top  (outside the outline)
U$22  HIP4086  [SOIC24-W]  7.62,-144.78 0 top  (outside the outline)
U$26  LT3508  [TSSOP16]  31.75,-111.76 0 top  (outside the outline)
U$29  LT1074HV  [TO220-5]  22.86,-99.06 0 top  (outside the outline)
U$31  IRLR024  [DPAK]  15.24,-201.93 0 top  (outside the outline)
U$32  IRLR024  [DPAK]  25.4,-201.93 0 top  (outside the outline)
U$33  IRLR024  [DPAK]  5.08,-214.63 0 top  (outside the outline)
U$35  IRLR024  [DPAK]  15.24,-214.63 0 top  (outside the outline)
U$36  IRLR024  [DPAK]  25.4,-214.63 0 top  (outside the outline)
U$37  ACS716  [SOIC16-W]  24.13,-187.96 0 top  (outside the outline)
U$38  SLIDE_SWTHROUGHHOLE  [SLIDE_SWITCH]  114.3,17.78 180 top

## Library data of the parts
5-3.3 BAT BMAGMOS_2 C1-C37 C39-C45 C47-C53 C55-C58 C63 C72-C78 CBIAS CI1 CI2 CIBMON CIIMON CO1 CO2 CTMR CVIN CVIN1 D1-D14 D19 D20 D26-D30 DATA1_1 DATA3 DATA4 GND59 H1-H6 H11 H12 HALL1 IRLED7-IRLED12 JP1 JP3-JP5 JP14 L1-L4 L8 L11 L12 LED1 LED2 LED6-LED14 LOWMAG1 M1-M7 MAINRESET MAINUSER MOT1 P1 P2 POWER1 POWER1_2 POWER2_2 POWER3 POWER5 PROG PROG_1 R1-R23 R26-R28 R31-R51 R54 R55 R58 R59 R61-R78 R82-R93 RBFB1 RBFB2 RCL RCS RCX RD RFB1 RFB2 RFDBK RIL RIS RMV1 RNTC1 ROFB1 ROFB2 RVM2 SECRESET1 SECUSER1 TMAG1 TMAGMOS1 TO_PIC TOPMAG1 U$1 U$2 U$4-U$8 U$13 U$16 U$17 U$21 U$22 U$26 U$29 U$31-U$33 U$35-U$38 = Gibbot v4
21.5K1 C38 C46 C79 JP2 L13 R24 R25 R29 R30 R52 R53 R56 R57 R60 U$3 = Gibbot

## Nets
1HO: R34.2 U$2.G
1HS: C19.2 D4.C MOT1.1 U$2.S U$22.23 U$31.D
1LO: R5.2 R35.2 U$31.G
2HO: R38.2 U$32.G
2HS: C18.1 D19.C MOT1.2 U$22.18 U$32.S U$33.D
2LO: R4.2 R36.2 U$33.G
3.3V: C1.1 C5.1 C6.1 C11.1 C12.1 C13.1 C14.1 C20.1 C22.1 C24.1 C26.1 C32.1 C33.1 C55.1 C56.1 C57.1 C58.1 L1.1 L1.2 L2.P$1 L8.1 L8.2 LED6.CAT MAINUSER.1 POWER2_2.1 PROG.2 PROG_1.2 R1.2 R3.2 R14.2 R15.1 R17.1 R18.1 R19.1 R31.1 R32.1 R33.1 R44.1 R61.2 R66.1 R67.1 R68.1 R69.1 R70.1 R71.1 R72.1 R77.2 R78.2 SECUSER1.1 U$1.10 U$1.19 U$1.26 U$1.38 U$1.57 U$4.10 U$4.19 U$4.26 U$4.38 U$4.57 U$13.1 U$16.3 U$16.8 U$16.9 U$16.13 U$17.3 U$17.8 U$17.9 U$17.13 U$37.14 U$38.1 U$38.6
3HO: R39.2 U$35.G
3HS: C17.1 D9.C MOT1.3 U$22.15 U$35.S U$36.D
3LO: R6.2 R37.2 U$36.G
5V: 5-3.3.3 C7.1 C9.+ C35.1 C76.1 D11.A D13.A D27.A D29.A HALL1.5 JP1.4 JP4.4 L3.P$2 L11.P$2 POWER2_2.2 POWER3.2 R7.2 R8.2 R9.2 R20.2 R23.1 R86.2 R91.1 TMAG1.4
12V: C29.1 C30.1 C74.1 D1.A D2.A D3.A L13.1 POWER3.1 R16.1 R85.1 R89.2 R90.2 U$22.20
24V: 21.5K1.2 C38.2 C41.+ C79.2 D7.C L12.2 LOWMAG1.2 POWER1.3 POWER1.4 POWER1_2.1 POWER1_2.2 U$21.4 U$21.5 U$21.12 U$26.4 U$26.5 U$26.12
48V: C40.+ POWER5.2 U$2.D U$29.5 U$32.D U$35.D
BAT: BAT.1 P2.D RBFB1.2 U$6.P$13
BFB: RBFB1.1 RBFB2.1 U$6.P$12
BGATE: P2.G U$6.P$14
BIAS: CBIAS.1 JP14.1 R76.1 U$6.P$9
BUCKOUT: CO1.+ CO2.+ L4.2 P1.D RFB1.2 U$6.P$19
CHRG: LED1.CAT U$6.P$8
CSN: P2.S RCS.P$1 U$6.P$15
CTS: U$1.59 U$13.12
CX: RCX.2 U$6.P$3
FBG: RBFB2.2 ROFB2.1 U$6.P$11
FLT: LED2.CAT U$6.P$7
GND: 5-3.3.1 BAT.2 BMAGMOS_2.S C1.2 C2.2 C3.2 C4.2 C5.2 C6.2 C7.2 C8.2 C9.- C10.- C11.2 C12.2 C13.2 C14.2 C15.- C16.1 C20.2 C21.1 C22.2 C23.2 C24.2 C25.1 C26.2 C27.2 C28.2 C29.2 C30.2 C31.2 C32.2 C33.2 C34.2 C35.2 C38.1 C39.2 C40.- C41.- C42.2 C43.2 C44.2 C45.2 C46.2 C47.2 C48.2 C49.1 C53.2 C55.2 C56.2 C57.2 C58.2 C63.- C72.2 C73.2 C74.2 C75.2 C76.2 C79.1 CBIAS.2 CI1.- CI2.- CIBMON.2 CIIMON.2 CO1.- CO2.- CTMR.1 CVIN.2 D5.A D8.A D10.A D12.A D14.A D20.A D26.A D28.A D30.A GND59.1 GND59.2 HALL1.4 IRLED7.1 IRLED8.1 IRLED9.1 IRLED10.1 IRLED11.1 IRLED12.1 JP1.3 JP2.1 JP4.3 JP5.1 M7.D MAINRESET.2 POWER1.1 POWER1.2 POWER1_2.3 POWER1_2.4 POWER5.1 PROG.3 PROG_1.3 R2.2 R11.1 R13.1 R21.1 R42.1 R59.1 R60.1 R73.1 R74.1 R75.1 R82.1 R84.1 R87.1 R92.1 RCL.1 RCX.1 RFB2.1 RIL.1 RNTC1.1 RVM2.1 SECRESET1.2 TMAG1.3 TMAGMOS1.S U$1.9 U$1.20 U$1.25 U$1.41 U$4.9 U$4.20 U$4.25 U$4.41 U$5.18 U$5.24 U$5.28 U$5.29 U$5.PAD U$6.P$6 U$6.P$24 U$7.P$2 U$8.3 U$8.PAD U$8.PAD2 U$13.10 U$16.1 U$16.11 U$16.15 U$16.17 U$16.18 U$17.1 U$17.11 U$17.15 U$17.17 U$17.18 U$21.17 U$22.6 U$22.10 U$26.17 U$29.3 U$29.PAD U$29.PAD2 U$37.5 U$37.6 U$37.7 U$37.8 U$37.9 U$37.16
HALL1: HALL1.3 R9.1 U$1.49
HALL2: HALL1.2 R8.1 U$1.50
HALL3: HALL1.1 R7.1 U$1.51
I_SENSE: U$1.2 U$37.12
IBMON: CIBMON.1 TO_PIC.1 U$6.P$2
IGATE: P1.G U$6.P$18
IIMON: CIIMON.1 TO_PIC.2 U$6.P$27
IL: RIL.2 U$6.P$28
IMU_INT1: U$1.35 U$17.12
IMU_INT2: U$4.35 U$16.12
LED1: LED7.CAT U$1.45
LED1_2: LED10.CAT U$4.45
LED2: LED8.CAT U$1.46
LED2_2: LED11.CAT U$4.46
LED3: LED9.CAT U$1.47
LED3_2: LED12.CAT U$4.47
LED4: LED14.CAT U$1.48
LED4_2: LED13.CAT U$4.48
LOW_MAG: U$1.30
LOW_MAG_2: BMAGMOS_2.G U$4.30
MAG1A: TMAG1.2 U$1.16
MAG1B: TMAG1.1 U$1.15
MAG2A: U$1.6
MAG2A_2: JP1.2 U$4.6
MAG2B: U$1.5
MAG2B_2: JP1.1 U$4.5
MCLR1: MAINRESET.1 PROG.1 R14.1 U$1.7
MCLR_2: PROG_1.1 R61.1 SECRESET1.1 U$4.7
MOTA: U$1.53
MOTA_2: JP4.2 U$4.52
MOTB: U$1.52
MOTB_2: JP4.1 U$4.53
N$2: R16.2 U$22.7
N$3: C16.2 U$22.9
N$4: R4.1 R5.1 R6.1 U$31.S U$33.S U$36.S U$37.1 U$37.2 U$37.3 U$37.4
N$5: R1.1 R2.1 U$37.15
N$6: C4.1 R3.1 U$37.13
N$7: C2.1 U$37.10
N$8: C3.1 U$37.11
N$9: R10.2 U$13.20
N$10: LED6.AN R10.1
N$11: LED7.AN R17.2
N$12: LED8.AN R18.2
N$13: LED9.AN R19.2
N$16: C15.+ U$1.56
N$17: LED14.AN R31.2
N$18: IRLED7.2 R32.2
N$19: IRLED8.2 R33.2
N$20: IRLED9.2 R44.2
N$21: C25.2 U$16.10
N$22: C27.1 U$16.20
N$23: D6.C TOPMAG1.2
N$24: C21.2 U$17.10
N$25: C23.1 U$17.20
N$26: R34.1 U$22.24
N$27: D6.A TMAGMOS1.D TOPMAG1.1
N$29: R11.2 U$21.13
N$30: C28.1 U$21.1 U$21.8
N$31: C31.1 R12.1
N$32: R12.2 U$21.15
N$34: U$1.13
N$35: R35.1 U$22.22
N$36: R36.1 U$22.21
N$37: R37.1 U$22.19
N$38: R38.1 U$22.17
N$39: R13.2 R15.2 U$21.16
N$40: R20.1 R21.2 U$21.9
N$42: C42.1 R93.1
N$43: M1.G R25.1 R28.1
N$44: R23.2 U$21.11
N$45: C34.1 R22.1
N$46: R22.2 U$21.10 U$21.14
N$47: C36.2 D8.C L2.P$2 U$21.3
N$48: R39.1 U$22.14
N$49: C36.1 D11.C U$21.2
N$50: C17.2 R40.1 U$22.13
N$51: C37.2 D12.C L3.P$1 U$21.6
N$52: C18.2 U$22.16
N$53: C37.1 D13.C U$21.7
N$54: C19.1 R43.1 U$22.1
N$55: D3.C R43.2
N$56: 5-3.3.2 5-3.3.4 C8.1 C10.+ U$38.2 U$38.5
N$58: D2.C R41.2
N$59: D1.C R40.2
N$60: D4.A D5.C
N$61: D9.A D10.C
N$62: D19.A D20.C
N$63: BMAGMOS_2.D D7.A LOWMAG1.1
N$64: M1.D R26.2
N$65: R25.2 U$5.2
N$66: C39.1 R24.2 U$5.1
N$67: M2.G R30.1 R45.1
N$68: C50.1 JP2.5 M1.S R24.1 R27.1 R28.2 R63.1 U$5.47
N$69: C43.1 R27.2 U$5.48
N$70: C44.1 R29.2 U$5.3
N$71: R30.2 U$5.4
N$72: M6.G R53.1 R54.2
N$73: M2.D R46.2
N$74: R47.1 U$5.44
N$75: M3.G R48.2
N$76: M4.G R47.2
N$77: C52.1 M3.D M4.D M5.D U$5.43
N$78: R49.1 U$5.42
N$79: M4.S R58.2
N$80: M5.G R49.2
N$81: JP2.3 R46.1 R50.2 R51.2 R52.1 R55.1
N$82: C45.1 R50.1 U$5.5
N$83: C46.1 R51.1 U$5.6 U$5.7 U$5.8 U$5.9 U$5.10 U$5.11
N$84: JP2.4 M2.S R26.1 R29.1 R45.2
N$85: R41.1
N$86: C47.1 R52.2 U$5.12 U$5.13
N$87: R53.2 U$5.14
N$88: R84.2 R85.2 U$26.16
N$89: C51.1 U$5.41
N$91: C48.1 R56.2 U$5.15
N$100: R57.2 U$5.16
N$101: C49.2 R60.2 U$5.17
N$102: C50.2 M3.S R58.1 R63.2 U$5.46
N$104: C63.+ U$4.56
N$105: M7.S R62.2
N$106: JP2.2 M6.D R54.1 R56.1 R62.1
N$107: M7.G R57.1 R59.2
N$108: LED10.AN R66.2
N$109: LED11.AN R67.2
N$110: LED12.AN R68.2
N$111: LED13.AN R69.2
N$112: IRLED10.2 R70.2
N$113: IRLED11.2 R71.2
N$114: IRLED12.2 R72.2
N$115: M6.S R55.2
N$116: C51.2 U$5.40
N$117: C52.2 U$5.39
N$118: M5.S R64.2 R65.2
N$119: R83.2 U$26.15
N$120: R64.1 U$5.38
N$121: R65.1 U$5.37
N$122: C53.1 U$5.19
N$123: R48.1 U$5.45
N$124: U$5.32
N$125: U$5.33
N$126: U$5.31
N$127: U$5.36
N$129: R82.2 U$26.13
N$130: C72.1 U$26.1 U$26.8
N$131: C73.1 R83.1
N$132: RCL.2 U$6.P$4
N$133: LED2.AN R74.2
N$134: R86.1 R87.2 U$26.9
N$135: R91.2 U$26.11 U$26.14
N$136: C75.1 R88.1
N$137: R88.2 U$26.10
N$138: C77.2 D26.C L13.2 R89.1 R90.1 U$26.3
N$139: C77.1 D27.C U$26.2
N$140: C78.2 D28.C L11.P$1 U$26.6
N$141: C78.1 D29.C U$26.7
N$142: D30.C L12.1 U$29.4
N$143: 21.5K1.1 R92.2 U$29.1
N$144: R93.2 U$29.2
N$145: LED1.AN R75.2
N$146: CVIN.1 JP5.2 RIS.P$2 RMV1.2 U$6.P$23
N$147: D14.C L4.1 U$8.4
N$148: RFB1.1 RFB2.2 U$8.1
N$149: RFDBK.2 U$6.P$20 U$8.2
N$150: CVIN1.2 U$6.P$21
N$151: CVIN1.1 RFDBK.1
N$152: R76.2 RD.1 U$6.P$10
N$153: CTMR.2 U$6.P$5
OFB: ROFB1.1 ROFB2.2 U$6.P$17
PGEC1: PROG.5 U$1.17
PGEC_2: PROG_1.5 U$4.17
PGED1: PROG.4 U$1.18
PGED_2: PROG_1.4 U$4.18
PWM1H: U$1.61 U$22.2
PWM1L: U$1.60 U$22.3
PWM2H: U$1.63 U$22.5
PWM2L: U$1.62 U$22.4
PWM3H: U$1.1 U$22.12
PWM3L: U$1.64 U$22.11
RD: RD.2 RNTC1.2
RTS: U$1.58 U$13.16
RX: U$1.4 U$13.2
SCL1: U$1.37 U$17.23
SCL1_2: U$4.37 U$16.23
SCL2: DATA3.1 DATA4.1 R77.1 U$1.32
SCL2_2: DATA1_1.1 U$4.31
SDA1: U$1.36 U$17.24
SDA1_2: U$4.36 U$16.24
SDA2: DATA3.2 DATA4.2 R78.1 U$1.31
SDA2_2: DATA1_1.2 U$4.32
TOP_MAG: TMAGMOS1.G U$1.44
TX: U$1.3 U$13.3
USER: MAINUSER.2 R42.2 U$1.14
USER_2: R73.2 SECUSER1.2 U$4.14
VIN: CI1.+ CI2.+ RIS.P$1 U$6.P$22 U$8.5
VM: RMV1.1 RVM2.2 U$6.P$25 U$7.P$1
VOUT: JP3.1 P1.S RCS.P$2 ROFB1.2 U$6.P$16

## Tracks (layer width: path | path; a pad name or v marks a point on that pad's centre or on a via)
1HO  (1 unrouted)
1HS  (via drill 0.9)  (6 unrouted)
  other vias: 203.58,54.48
  pour Top (no thermals): 191.52,69.6 arc-90 191.77,69.34 191.77,67.56 arc90 192.02,67.31 204.47,67.31 arc-90 204.72,67.06 204.72,47.24 arc-90 204.47,46.99 200.66,46.99 arc-90 200.41,47.24 200.28,58.17 arc90 199.77,58.67 192.02,58.67 arc-90 191.77,58.93 191.77,65.79 arc90 191.52,66.04 188.21,66.04 arc-90 187.96,66.29 187.96,69.34 arc-90 188.21,69.6
1LO  (2 unrouted)
2HO  (1 unrouted)
2HS  (5 unrouted)
  pour Top (no thermals): 191.52,51.82 arc-90 191.77,51.56 191.77,49.91 arc90 192.28,49.4 199.39,49.4 arc-90 199.64,49.15 199.64,46.48 arc90 200.15,45.97 204.47,45.97 arc-90 204.72,45.72 204.72,43.18 arc-90 204.47,42.93 200.15,42.93 arc90 199.64,42.42 199.64,41.15 arc-90 199.39,40.89 192.02,40.89 arc-90 191.77,41.15 191.77,47.75 arc90 191.26,48.26 188.21,48.26 arc-90 187.96,48.51 187.96,51.56 arc-90 188.21,51.82
2LO  (2 unrouted)
3.3V  (via drill 0.6, 0.9)  (56 unrouted)
  Top 0.203: U$1.38 135.91,37.36 135,36.45 135,29.46 135.24,29.23 136.04,29.23
  Top 0.254: C14.1 134.62,54.61 135.04,54.19 C11.1 135.04,52.41 136.41,51.04 U$1.10 | 125.98,43.18 126.5,43.7 U$1.26 | U$1.57 144.27,44.7 145.8,43.18 C12.1 146.47,43.35 147.7,44.58 v147.7,44.83 | v125.73,41.91 125.73,42.93 | 125.73,42.93 125.48,43.18 | 125.48,43.18 PROG.2 | 125.73,42.93 125.98,43.18 | 125.48,43.18 125.98,43.18 | v131.7,52.07 L1.1 130.39,49.78 | v125.48,35.43 125.9,35.43 126.15,35.69 R14.2 | 136.04,29.23 136.06,29.21 C13.1 136.31,28.19 136.56,27.94 v136.56,26.04 136.56,21.21 136.82,20.95 138.65,20.95 | v125.73,45.72 C33.1 | U$1.19 133.1,47.2 133.35,47.45 133.35,48.26 132.08,49.53 130.64,49.53 | 130.64,49.53 130.14,49.53 | 130.39,49.78 130.64,49.53 | 130.39,49.78 130.14,49.53 | L1.2 128.69,49.78 128.94,49.53 130.14,49.53
  Top 0.406: U$38.6 125.48,19.43 125.73,19.68
  Top 0.508: 160.66,74.93 160.15,74.42 v160.15,72.39 | v137.16,67.82 134.71,67.82 | U$38.1 U$38.6 | v114.55,55.88 v125.73,55.88 C14.1
  Bottom 0.254: v131.7,52.07 134.37,52.07 134.62,52.32 133.77,55.88 | v125.48,35.43 125.73,35.69 v125.73,41.91 v125.73,45.72 v125.73,55.88 | 148.59,56.9 148.21,57.28 146.05,57.28 | 148.59,56.9 148.59,54.61 147.7,53.72 v147.7,44.83 147.7,26.42 147.32,26.04 v136.56,26.04 | 148.59,56.9 148.97,57.28 153.67,57.28
  Bottom 0.508: v137.16,67.82 137.16,71.88 137.67,72.39 v160.15,72.39 160.15,60.96 156.46,57.28 153.67,57.28 146.05,57.28 136.02,57.28 133.77,55.88 | U$38.6 116.79,22.15 114.55,24.38 v114.55,55.88 114.55,59.74 115.06,60.25 MAINUSER.1
  other vias: 4.83,30.86
  pour Top (no thermals): 7.62,22.99 arc90 7.87,23.24 7.87,36.04 arc-90 8.28,36.45 10.52,36.45 arc90 10.92,36.86 10.92,36.96 arc90 10.67,37.21 7.37,37.21 arc-90 7.11,37.47 7.11,41.66 arc90 6.86,41.91 2.54,41.91 arc90 2.29,41.66 2.29,23.24 arc90 2.54,22.99
3HO  (1 unrouted)
3HS  (via drill 0.9)  (6 unrouted)
  other vias: 203.71,24.26
  pour Top (no thermals): 191.52,34.04 arc-90 191.77,33.78 191.77,32.13 arc90 192.28,31.62 199.9,31.62 arc90 200.41,32.13 200.41,41.66 arc-90 200.66,41.91 204.47,41.91 arc-90 204.72,41.66 204.72,23.37 arc-90 204.47,23.11 192.02,23.11 arc-90 191.77,23.37 191.77,29.97 arc90 191.26,30.48 188.21,30.48 arc-90 187.96,30.73 187.96,33.78 arc-90 188.21,34.04
3LO  (2 unrouted)
5V  (via drill 0.6, 0.9)  (22 unrouted)
  Top 0.203: 131.32,18.92 v131.32,21.08
  Top 0.254: 211.46,20.95 208.66,20.95 206.76,19.05 v204.22,19.05 | 211.46,20.95 211.71,20.7 | 211.71,20.7 211.71,12.22 211.46,11.97 | 211.71,21.21 211.46,20.95 | 211.71,21.21 211.71,20.7 | 5-3.3.3 131.32,18.92 | 211.71,21.21 v211.71,25.62 v211.7,25.63 | v208.15,74.04 209.8,74.04 | 115.8,50.57 118.36,48.01 v118.36,46.74
  Top 0.406: 5-3.3.3 133.2,18.82 133.82,18.2 C9.+ C7.1 | v95.25,34.29 91.85,34.29 91.44,34.7 | v100.33,13.97 99.95,13.97
  Top 0.508: C7.1 140.21,18.2 140.59,17.82 v140.59,11.43 | v113.03,26.67 112.26,25.9 | v109.22,15.24 v109.22,11.43 v109.22,10.03
  Bottom 0.203: v131.32,21.08 126.75,21.08 126.49,21.34 126.49,25.15 126.24,25.4 123.44,25.4 123.19,25.65 | 119.38,46.48 119.13,46.74 v118.36,46.74
  Bottom 0.254: v204.22,11.43 v204.22,15.24 v204.22,19.05 | v208.15,74.04 207.01,74.04 206.76,73.79 206.76,39.62 211.71,34.67 v211.71,25.62 | 123.19,25.65 123.19,38.1 119.38,41.91 119.38,46.48
  Bottom 0.406: v95.25,34.29 99.92,34.29 100.33,33.88 v100.33,22.86 v100.33,13.97
  Bottom 0.508: v204.22,11.43 v140.59,11.43 v109.22,11.43 102.87,11.43 v101.6,12.7 v100.33,13.97 | v113.03,26.67 113.03,24.13 109.22,20.32 v109.22,15.24
  other vias: 91.31,13.46 30.35,28.7
  pour Top (no thermals): 82.65,16.79 arc-90 82.68,16.81 90.17,16.81 arc90 90.42,17.07 90.42,19.84 arc-90 90.68,20.09 93.73,20.09 arc-90 93.98,19.84 93.98,16.26 arc90 94.23,16 96.9,16 96.9,14.94 arc90 97.16,14.68 100.15,14.68 arc-90 100.41,14.43 100.38,13.41 arc-90 100.13,13.16 96.77,13.16 arc90 96.52,12.9 96.52,11.38 arc-90 96.27,11.13 82.8,11.13 arc-90 82.55,11.38 82.55,11.43
  pour Top (no thermals): 27.66,22.96 arc-90 27.64,22.99 27.64,30.48 arc90 27.38,30.73 24.61,30.73 arc-90 24.36,30.99 24.36,34.04 arc-90 24.61,34.29 28.19,34.29 arc90 28.45,34.54 28.45,37.21 29.51,37.21 arc90 29.77,37.47 29.77,40.46 arc-90 30.02,40.72 31.04,40.69 arc-90 31.29,40.44 31.29,37.08 arc90 31.55,36.83 33.07,36.83 arc-90 33.32,36.58 33.32,23.11 arc-90 33.07,22.86 33.02,22.86
12V  (12 unrouted)
  pour Top: 100.3,41.22 77.85,41.22 arc-90 77.6,41.48 77.6,53.72 arc-90 77.85,53.98 79.63,53.98 arc-90 79.88,53.72 79.88,43.81 arc90 80.14,43.56 100.33,43.56 arc-90 100.58,43.31 100.58,41.53
24V  (via drill 0.9)  (17 unrouted)
  other vias: 59.05,15.11
  pour Top (no thermals): 86.49,25.53 86.49,25.27 arc-90 86.23,25.02 78.99,25.02 arc90 78.74,24.77 78.74,22.35 arc-90 78.49,22.1 67.56,22.1 arc90 67.31,21.84 67.31,9.78 arc-90 67.06,9.53 16.76,9.53 arc-90 16.51,9.78 16.51,18.8 arc-90 16.76,19.05 18.41,19.05 arc90 18.67,19.3 18.67,26.54 arc-90 18.92,26.8 19.18,26.8 arc-90 19.43,26.54 19.43,19.3 arc90 19.68,19.05 21.21,19.05 arc-90 21.46,18.8 21.46,12.7 arc90 21.72,12.45 28.85,12.45 arc45 29.03,12.52 29.21,12.7 30.02,13.64 arc-45 30.2,13.72 48.51,13.72 arc90 49.02,14.22 49.02,19.3 arc90 48.77,19.56 43.81,19.56 arc-90 43.56,19.81 43.56,74.8 arc-90 43.81,75.06 47.24,75.06 arc-90 47.5,74.8 47.5,48.13 arc90 55.75,39.88 66.17,39.88 arc-67 68.83,38.35 arc13 70.48,35.81 arc-39 72.39,30.48 72.39,28.19 arc90 72.64,27.94 78.49,27.94 arc-90 78.74,27.69 78.74,26.04 arc90 78.99,25.78 86.23,25.78 arc-90
48V  (via drill 0.6, 0.9)  (6 unrouted)
  other vias: 193.29,39.24 194.56,39.24 195.83,39.24 197.1,39.24 198.37,39.24 193.29,74.8 194.56,74.8 195.83,74.8 197.1,74.8 198.37,74.8 193.29,57.02 194.56,57.02 195.83,57.02 197.1,57.02 198.37,57.02 65.28,82.04 66.55,82.04 67.82,82.04 65.28,80.64 66.55,80.64 67.82,80.64 103,81.15 116.08,81.28 66.42,76.96
  pour Top (no thermals): 192.41,32.51 192.41,39.62 arc-90 192.66,39.88 199.14,39.88 arc-90 199.39,39.62 199.39,32.51 arc-90 199.14,32.26 192.66,32.26 arc-90
  pour Bottom (isolate 0.406, rank 3, no thermals): 199.14,82.55 65.02,82.55 arc90 64.77,82.3 64.77,80.26 arc90 65.02,80.01 122.56,80.01 arc-90 122.81,79.76 122.81,76.2 arc90 124.71,74.3 arc90 126.62,76.2 126.62,79.76 arc-90 126.87,80.01 127,80.01 192.15,80.01 arc-90 192.41,79.76 192.41,32.51 arc90 192.66,32.26 199.14,32.26 arc90 199.39,32.51 199.39,82.3 arc90
  pour Top (no thermals): 192.41,50.29 192.41,57.4 arc-90 192.66,57.66 199.14,57.66 arc-90 199.39,57.4 199.39,50.29 arc-90 199.14,50.04 192.66,50.04 arc-90
  pour Top (no thermals): 192.41,68.07 192.41,75.18 arc-90 192.66,75.44 199.14,75.44 arc-90 199.39,75.18 199.39,68.07 arc-90 199.14,67.82 192.66,67.82 arc-90
  pour Top (no thermals): 67.56,82.55 65.02,82.55 arc90 64.77,82.3 64.77,80.01 arc-90 64.52,79.76 61.72,79.76 arc90 61.47,79.5 61.47,77.98 arc90 61.72,77.72 64.52,77.72 arc-90 64.77,77.47 64.77,63.63 64.77,63.61 arc45 64.84,63.43 66.73,61.54 arc45 66.91,61.47 74.68,61.47 arc90 74.93,61.72 74.93,63.5 arc90 74.68,63.75 69.7,63.75 arc-45 69.52,63.83 67.89,65.46 arc-45 67.82,65.64 67.82,82.3 arc90
BAT  (3 unrouted)
BFB  (2 unrouted)
BGATE  (1 unrouted)
BIAS  (3 unrouted)
BUCKOUT  (5 unrouted)
CHRG  (1 unrouted)
CSN  (2 unrouted)
CTS  (via drill 0.6)  (1 unrouted)
  Top 0.254: U$1.59 146.41,45.7 v146.81,46.1 | v147.32,55.63 147.32,57.4 147.57,57.66 154.94,57.66 155.57,58.29 155.57,74.42 150.94,79.06
  Bottom 0.254: v146.81,46.1 146.81,55.12 v147.32,55.63
CX  (1 unrouted)
FBG  (2 unrouted)
FLT  (1 unrouted)
GND  (via drill 0.6, 0.9)  (178 unrouted)
  Top 0.254: PROG.3 124.71,44.2 U$1.25 | U$1.41 137.41,37.59 137.66,37.34 138.43,37.34 139.32,36.45 139.32,29.46 139.06,29.21 C13.2 138.01,29.63 v137.16,30.48 | C14.2 137.16,54.61 136.74,54.19 C11.2 136.91,53.17 U$1.9 | C33.2 129.12,46.45 | v127,47.37 127.67,46.7 128.87,46.7 129.12,46.45 | 129.37,46.7 U$1.20 | 129.12,46.45 129.37,46.7 | 129.37,46.7 128.31,46.7 | C15.- 149.44,39.03 v149.48,38.99 | C12.2 v149.61,43.18
  Top 0.406: C9.- C7.2 138.91,19.9 139.32,19.88 v139.32,19.94 | 131.56,14.39 5-3.3.1 131.44,14.22 132.84,14.22 133.95,13.12 C10.- C8.2 138.91,13.12 139.32,13.53 v139.32,15.49 | R42.1 126.15,63.5 125.64,64.01 v124.97,64.01
  Bottom 0.254: v137.16,30.48 137.16,30.61 | v127,47.37 127.25,47.24 | v149.48,38.99 149.73,39.12 | 130.81,24.13 132.08,24.13
  Bottom 0.406: v139.32,15.49 139.19,15.62 139.19,15.88 | v139.32,19.94 139.32,19.81 | v124.97,64.01 124.97,64.39 | 72.39,30.48 72.39,30.23 72.26,30.1 | 19.43,39.5 19.43,39.37 | 72.64,24.13 72.52,24
  Bottom 1.016: 55.88,80.26 arc90 56.01,80.39 56.01,80.52
  other vias: 176.53,71.88 175.26,70.61 176.53,70.61 175.26,69.34 176.53,69.34 175.26,68.07 176.53,68.07 175.26,71.88 208.28,57.15 87.63,28.83 90.17,28.83 15.62,27.94 15.62,30.48 35.94,18.41 212.09,80.01 98.3,49.28 72.39,12.7
  pour Top (no thermals): 179.58,72.9 174.5,72.9 174.24,72.64 174.24,67.82 174.5,67.56 179.58,67.56 179.83,67.82 179.83,72.64
  pour Top (no thermals): 210.44,57.78 208.15,57.78 arc90 207.52,57.15 arc90 208.15,56.52 210.44,56.52
  pour Top (no thermals): 90.17,24.51 90.17,28.07 arc-90 90.42,28.32 arc90 90.68,28.57 90.68,29.08 arc90 90.42,29.34 87.38,29.34 arc90 87.12,29.08 87.12,28.57 arc90 87.38,28.32 arc-90 87.63,28.07 87.63,24.51
  pour Top (no thermals): 19.94,30.48 16.38,30.48 arc-90 16.13,30.73 arc90 15.88,30.99 15.37,30.99 arc90 15.11,30.73 15.11,27.69 arc90 15.37,27.43 15.88,27.43 arc90 16.13,27.69 arc-90 16.38,27.94 19.94,27.94
  pour Bottom (isolate 0.254, rank 4): 0,9.53 215.9,9.53 215.9,82.55 0,82.55
  pour Top (no thermals): 35.31,14.22 35.31,18.41 arc-90 35.81,18.92 36.07,18.92 arc-90 36.58,18.41 36.58,14.22
  pour Top: 104.65,44.45 81.15,44.45 arc-90 80.9,44.7 80.9,54.36 arc-90 81.15,54.61 92.2,54.61 arc90 92.58,55.12 92.58,60.71 arc90 92.33,60.96 83.31,60.96 arc-90 83.06,61.21 83.06,75.44 arc-90 83.31,75.69 89.92,75.69 arc90 90.17,75.95 90.17,82.17 arc-90 90.42,82.42 104.65,82.42 arc-90 104.9,82.17 104.9,44.7 arc-90
GND1  (via drill 0.6)
  other vias: 47.88,18.41
  pour Top (no thermals): 47.24,14.22 47.24,18.41 arc-90 47.75,18.92 48.01,18.92 arc-90 48.51,18.41 48.51,14.22
HALL1  (via drill 0.9)  (2 unrouted)
  Top 0.203: 149.35,30.48 143.11,30.48 142.86,30.73 U$1.49
  Top 0.254: 149.35,30.48 149.61,30.23 v149.61,27.94 149.61,18.41 149.86,18.16 197.61,18.16 199.9,15.88 199.9,12.95 200.15,12.7 200.83,12.7 | 207.9,13.97 207.65,13.72 207.65,12.95 207.39,12.7 201.33,12.7 201.08,12.45 200.83,12.7 | 200.83,12.7 202.31,12.7
HALL2  (via drill 0.9)  (2 unrouted)
  Top 0.254: U$1.50 143.76,41.2 144.15,40.82 144.15,31.37 144.4,31.11 150.62,31.11 150.88,30.86 v150.88,25.4 150.88,19.18 151.13,18.92 197.99,18.92 200.41,16.51 200.83,16.51 | 201.33,16.51 201.08,16.26 200.83,16.51 | 200.83,16.51 201.33,16.51 | 201.33,16.51 207.01,16.51 208.55,14.97
HALL3  (via drill 0.9)  (2 unrouted)
  Top 0.254: U$1.51 144.02,41.7 144.78,40.94 144.78,32 145.03,31.75 152.02,31.75 152.27,31.5 v152.27,27.94 152.27,19.94 152.53,19.68 198.5,19.68 200.41,17.78 200.83,17.78 | 200.83,17.78 201.08,18.03 201.33,17.78 | 200.83,17.78 201.33,17.78 | 201.33,17.78 207.01,17.78 208.82,15.97
I_SENSE  (1 unrouted)
  Top 0.254: 167,67.94 166.37,68.58 160.53,68.58 160.27,68.33 160.27,59.94 152.53,52.2 149.73,52.2 149.22,51.69 140.66,51.69 140.41,51.44 U$1.2
IBMON  (2 unrouted)
IGATE  (1 unrouted)
IIMON  (2 unrouted)
IL  (1 unrouted)
IMU_INT1  (via drill 0.6)  (1 unrouted)
  Top 0.203: U$1.35 134.41,37.89 133.73,37.21 v132.97,37.21 | v135.38,27.69 132.31,27.69 132.06,27.94
  Bottom 0.203: v135.38,27.69 135.38,36.96 135.13,37.21 v132.97,37.21
IMU_INT2  (1 unrouted)
LED1  (1 unrouted)
  Top 0.203: U$1.45 139.41,37.63 140.34,36.7 140.34,28.57 139.7,27.94
LED1_2  (1 unrouted)
LED2  (1 unrouted)
  Top 0.203: U$1.46 139.91,37.76 140.97,36.7 140.97,28.7 141.22,28.45 141.99,28.45 142.24,28.19
LED2_2  (1 unrouted)
LED3  (1 unrouted)
  Top 0.203: 144.78,28.83 144.53,29.08 141.86,29.08 141.6,29.34 141.6,36.7 140.41,37.9 U$1.47
LED3_2  (1 unrouted)
LED4  (1 unrouted)
  Top 0.203: 147.32,29.59 147.07,29.84 142.49,29.84 142.24,30.1 142.24,38.5
  Top 0.254: 142.24,38.5 141.99,38.75 U$1.48
LED4_2  (1 unrouted)
LOW_MAG  (via drill 0.6)
  Top 0.254: U$1.30 130.51,41.7 129.41,42.8 v128.27,42.8
  Bottom 0.254: v156.08,23 127.64,23 127.38,23.26 127.38,42.55 127.64,42.8 v128.27,42.8
LOW_MAG_2  (1 unrouted)
MAG1A  (1 unrouted)
  Top 0.254: U$1.16 133.41,51.5 132.72,52.2 132.72,53.09 132.46,53.34 120.9,53.34 120.13,52.57
MAG1B  (1 unrouted)
  Top 0.254: U$1.15 133.91,52.02 133.35,52.58 133.35,53.98 133.1,54.23 119.89,54.23 119.23,53.57
MAG2A  (via drill 0.6)
  Top 0.254: U$1.6 138.41,51.07 137.67,51.82 137.67,53.34 v138.3,53.98 | v142.62,53.98 143.13,53.47 151.51,53.47 156.21,58.17 156.21,82.17 156.46,82.42 203.71,82.42 203.96,82.17 203.96,72.64 204.72,71.89
  Bottom 0.254: v142.62,53.98 v138.3,53.98
MAG2A_2  (1 unrouted)
MAG2B  (via drill 0.6)
  Top 0.254: U$1.5 138.91,52.23 v138.56,52.58 | v141.35,52.7 151.76,52.7 156.97,57.91 156.97,81.41 157.23,81.66 202.95,81.66 203.2,81.41 203.2,71.64 203.95,70.89
  Bottom 0.254: v138.56,52.58 141.22,52.58 v141.35,52.7
MAG2B_2  (1 unrouted)
MCLR1
  Top 0.203: U$1.7 137.91,45.2 131.83,39.12 131.57,39.12 | 131.32,38.86 131.57,39.12 | 131.06,39.12 124.71,39.12 123.83,40.01 PROG.1 119.94,43.89 MAINRESET.1 | 131.06,39.12 131.32,38.86 | 131.06,39.12 131.57,39.12 | R14.1 128.74,35.94 131.06,35.94 131.32,36.2 131.32,38.86
MCLR_2  (3 unrouted)
MOTA  (via drill 0.9)
  Top 0.254: U$1.53 144.53,42.7 146.05,41.18 146.05,33.27 146.3,33.02 154.56,33.02 154.81,32.77 v154.81,27.94 154.81,21.59 155.07,21.34 205.99,21.34 208.29,23.63
MOTA_2  (1 unrouted)
MOTB  (via drill 0.9)
  Top 0.254: U$1.52 144.27,42.2 145.41,41.06 145.41,32.64 145.67,32.38 153.29,32.38 153.54,32.13 v153.54,25.4 153.54,20.84 153.8,20.59 206.26,20.59 208.3,22.63
MOTB_2  (1 unrouted)
N$2  (1 unrouted)
N$3  (1 unrouted)
N$4  (9 unrouted)
N$5  (2 unrouted)
N$6  (2 unrouted)
N$7  (1 unrouted)
N$8  (1 unrouted)
N$9  (1 unrouted)
N$10  (1 unrouted)
N$11  (1 unrouted)
N$12  (1 unrouted)
N$13  (1 unrouted)
N$16
  Top 0.254: 147.45,40.64 C15.+ 147.32,40.64 143.76,44.2 U$1.56
N$17  (1 unrouted)
N$18  (1 unrouted)
N$19  (1 unrouted)
N$20  (1 unrouted)
N$21  (1 unrouted)
N$22  (1 unrouted)
N$23  (1 unrouted)
N$24  (1 unrouted)
N$25  (1 unrouted)
N$26  (1 unrouted)
N$27  (2 unrouted)
N$29  (1 unrouted)
N$30  (2 unrouted)
N$31  (1 unrouted)
N$32  (1 unrouted)
N$33  (via drill 0.9)
  other vias: 102.11,18.67
N$35  (1 unrouted)
N$36  (1 unrouted)
N$37  (1 unrouted)
N$38  (1 unrouted)
N$39  (2 unrouted)
N$40  (2 unrouted)
N$42  (1 unrouted)
N$43  (2 unrouted)
N$44  (1 unrouted)
N$45  (1 unrouted)
N$46  (2 unrouted)
N$47  (3 unrouted)
N$48  (1 unrouted)
N$49  (2 unrouted)
N$50  (2 unrouted)
N$51  (3 unrouted)
N$52  (1 unrouted)
N$53  (2 unrouted)
N$54  (2 unrouted)
N$55  (1 unrouted)
N$56
  Top 0.406: C8.1 C10.+ 134.62,16.13 134.21,16.54 5-3.3.2 125.15,16.54 5-3.3.4
  Top 0.508: 5-3.3.4 125.12,15.75 124.61,15.24 119.38,15.24 118.11,13.97 114.55,13.97 114.3,14.22 U$38.2 U$38.5
N$57  (via drill 0.9)
  other vias: 182.25,68.33
N$58  (1 unrouted)
N$59  (1 unrouted)
N$60  (1 unrouted)
N$61  (1 unrouted)
N$62  (1 unrouted)
N$63  (2 unrouted)
N$64  (1 unrouted)
N$65  (1 unrouted)
N$66  (2 unrouted)
N$67  (2 unrouted)
N$68  (7 unrouted)
N$69  (2 unrouted)
N$70  (2 unrouted)
N$71  (1 unrouted)
N$72  (2 unrouted)
N$73  (1 unrouted)
N$74  (1 unrouted)
N$75  (1 unrouted)
N$76  (1 unrouted)
N$77  (4 unrouted)
N$78  (1 unrouted)
N$79  (1 unrouted)
N$80  (1 unrouted)
N$81  (5 unrouted)
N$82  (2 unrouted)
N$83  (7 unrouted)
N$84  (4 unrouted)
N$86  (3 unrouted)
N$87  (1 unrouted)
N$88  (2 unrouted)
N$89  (1 unrouted)
N$91  (2 unrouted)
N$92  (via drill 0.6)
  other vias: 101.6,70.99
N$93  (via drill 0.6)
  other vias: 101.6,69.6
N$94  (via drill 0.6)
  other vias: 101.6,68.2
N$95  (via drill 0.6)
  other vias: 101.6,66.8
N$96  (via drill 0.6)
  other vias: 101.6,65.41
N$97  (via drill 0.6)
  other vias: 101.6,64.01
N$98  (via drill 0.6)
  other vias: 101.6,62.61
N$99  (via drill 0.6)
  other vias: 101.6,61.21
N$100  (1 unrouted)
N$101  (2 unrouted)
N$102  (4 unrouted)
N$103  (via drill 0.9)
  other vias: 75.82,57.66
N$104  (1 unrouted)
N$105  (1 unrouted)
N$106  (4 unrouted)
N$107  (2 unrouted)
N$108  (1 unrouted)
N$109  (1 unrouted)
N$110  (1 unrouted)
N$111  (1 unrouted)
N$112  (1 unrouted)
N$113  (1 unrouted)
N$114  (1 unrouted)
N$115  (1 unrouted)
N$116  (1 unrouted)
N$117  (1 unrouted)
N$118  (2 unrouted)
N$119  (1 unrouted)
N$120  (1 unrouted)
N$121  (1 unrouted)
N$122  (1 unrouted)
N$123  (1 unrouted)
N$129  (1 unrouted)
N$130  (2 unrouted)
N$131  (1 unrouted)
N$132  (1 unrouted)
N$133  (1 unrouted)
N$134  (2 unrouted)
N$135  (2 unrouted)
N$136  (1 unrouted)
N$137  (1 unrouted)
N$138  (5 unrouted)
N$139  (2 unrouted)
N$140  (3 unrouted)
N$141  (2 unrouted)
N$142  (2 unrouted)
N$143  (2 unrouted)
N$144  (1 unrouted)
N$145  (1 unrouted)
N$146  (4 unrouted)
N$147  (2 unrouted)
N$148  (2 unrouted)
N$149  (2 unrouted)
N$150  (1 unrouted)
N$151  (1 unrouted)
N$152  (2 unrouted)
N$153  (1 unrouted)
OFB  (2 unrouted)
PGEC1
  Top 0.254: U$1.17 129.6,48.2 127,50.8 PROG.5
PGEC_2  (1 unrouted)
PGED1
  Top 0.254: U$1.18 128.83,47.7 128.27,48.26 PROG.4
PGED_2  (1 unrouted)
PWM1H  (1 unrouted)
  Top 0.203: U$1.61 145.25,46.7 146.05,47.5 154.31,47.5 155.07,48.26
PWM1L  (1 unrouted)
  Top 0.203: U$1.60 145.64,46.2 146.43,46.99
PWM2H  (via drill 0.6)  (1 unrouted)
  Top 0.203: U$1.63 144.47,47.7 146.05,49.28 v152.65,49.28
  Bottom 0.203: v152.65,49.28 v152.65,44.45
PWM2L  (via drill 0.6)  (1 unrouted)
  Top 0.203: U$1.62 144.86,47.2 146.05,48.39 v153.67,48.39
  Bottom 0.203: v153.67,48.39 v153.67,45.72
PWM3H  (via drill 0.6)  (1 unrouted)
  Top 0.203: v151.38,35.05 154.43,35.05 154.94,35.56 | U$1.1 145.15,50.15 146.05,51.05 150.62,51.05 v150.75,51.18
  Bottom 0.203: v150.75,51.18 150.75,35.69 v151.38,35.05
PWM3L  (via drill 0.6)  (1 unrouted)
  Top 0.203: U$1.64 144.09,48.2 146.05,50.16 v151.64,50.16 | v152.27,36.2 154.69,36.2 155.32,36.83
  Bottom 0.203: v151.64,50.16 151.64,36.83 v152.27,36.2
RD  (1 unrouted)
RTS  (via drill 0.6)  (1 unrouted)
  Top 0.254: U$1.58 144.92,45.2 145.41,44.7 v146.18,44.7 | v145.8,55.63 145.8,58.17 146.05,58.42 154.69,58.42 154.94,58.67 154.94,67.69 142.94,79.69
  Bottom 0.254: v146.18,44.7 145.8,45.09 v145.8,55.63
RX  (1 unrouted)
  Top 0.254: 136.94,58.93 138.46,57.4 139.57,57.4 139.83,57.15 139.83,52.45 139.41,52.03 U$1.4
SCL1  (1 unrouted)
  Top 0.203: 130.06,34.67 130.31,34.92 134.24,34.92 134.49,35.18 134.49,36.58 135.41,37.49 U$1.37
SCL1_2  (1 unrouted)
SCL2  (via drill 0.6)  (3 unrouted)
  Top 0.203: 124.71,37.97 128.4,37.97 129.54,36.83 v130.3,36.83
  Top 0.254: v129.67,40.01 129.67,40.45 129.92,40.7 U$1.32 | 208.67,65.27 202.44,71.5 202.44,80.64 202.18,80.9 158.12,80.9 157.86,80.64 v157.86,60.58 | 124.71,37.97 121.92,37.97 119.75,40.14
  Bottom 0.203: v130.3,36.83 130.3,39.75 130.05,40.01 v129.67,40.01
  Bottom 0.254: v129.67,40.01 129.92,40.26 129.92,57.78 130.18,58.04 155.32,58.04 v157.86,60.58
SCL2_2  (1 unrouted)
SDA1  (1 unrouted)
  Top 0.203: 129.56,35.18 129.81,35.43 133.6,35.43 133.86,35.69 133.86,36.7 134.91,37.76 U$1.36
SDA1_2  (1 unrouted)
SDA2  (via drill 0.6)  (3 unrouted)
  Top 0.254: v129.41,38.23 129.16,38.48 122.43,38.48 119.77,41.14 | v128.65,41.02 128.96,41.2 U$1.31 | 208.65,64.27 201.68,71.25 201.68,79.88 201.42,80.14 159.26,80.14 159,79.88 v159,62.1
  Bottom 0.254: v129.41,38.23 128.65,38.99 v128.65,41.02 129.29,41.66 129.29,58.55 129.54,58.8 154.69,58.8 157.99,62.1 v159,62.1
SDA2_2  (1 unrouted)
TOP_MAG  (via drill 0.6)  (1 unrouted)
  Top 0.203: 124.51,23.98 124.71,23.78 v124.71,20.95 | v137.79,21.97 137.79,26.92 139.83,28.96 139.83,36.58 138.91,37.49 U$1.44
  Bottom 0.203: v124.71,20.95 124.71,20.02 124.92,19.81 135.64,19.81 v137.79,21.97
TX  (1 unrouted)
  Top 0.254: 138.94,58.29 139.19,58.04 140.21,58.04 140.46,57.78 140.46,52.2 139.91,51.65 U$1.3
USER  (via drill 0.6)
  Top 0.254: U$1.14 134.41,52.28 133.99,52.7 133.99,54.48 133.48,54.99 119,54.99 v118.87,54.86 | MAINUSER.2 127.6,66.75 127.85,66.5 R42.2
  Bottom 0.254: MAINUSER.2 122.94,66.75 123.19,66.5 123.19,59.29 arc-45 123.12,59.11 v118.87,54.86
USER_2  (2 unrouted)
VIN  (4 unrouted)
VM  (3 unrouted)
VOUT  (4 unrouted)